# EAGLE board IOB-PanelTemplate (EAGLE 7.7.0)

Size 100 x 100 mm. Coordinates in mm from the lower left corner, seen from the top.
Copper layers (1*16): Top 0.035mm / dielectric 1.5mm / Bottom 0.035mm
Design rules "default": minimum track width 10mil, minimum drill 0.6mm, track to track 8mil, track to pad 8mil, pad to pad 8mil, via to via 8mil, smd to smd 8mil, copper to edge 40mil, drill to drill 8mil, minimum pad ring 10mil, minimum via ring 8mil, stop-mask expansion 4mil, vias tented up to drill 0mil, thermal gap 10mil

## Footprints (pad centres in the part's own frame; a part is rotated, then mirrored left to right if it is on the bottom)
FIDUCIAL_1MM = smd 1 x 1: 1 0,0
BOARD-DINRAIL-3.17IN-4X-IOB = hole 3.1: 5.08,96.52; 95.25,96.52; 5.08,3.81; 95.25,3.81

## Placement (x,y rotation side)
FID1  [FIDUCIAL_1MM]  95,10 0 top
FID3  [FIDUCIAL_1MM]  15,95 0 top
VINX1  [BOARD-DINRAIL-3.17IN-4X-IOB]  0,0 0 top

## Library data of the parts
FID1 FID3 VINX1 = SPCoast

## Text on the board
tPlace: V1.0 2020-01
Document: Yellow Soldermask / Black Silkscreen
tDocu: IOB I/O Generic | 15, 95 | SPCoast.com John Plocher | 95, 10